# Altium PCB activity_tracker_tester.PcbDoc
Units mm, origin at the board's own origin, x right, y up, seen from the top; angles counter-clockwise.
Board outline 40 x 46 mm, 4 copper layers (Top Layer, MidLayer1, Mid-Layer 2, Bottom Layer), stack 0.79 mm thick; 37 components, 32 nets, 125 pads, 2 vias.
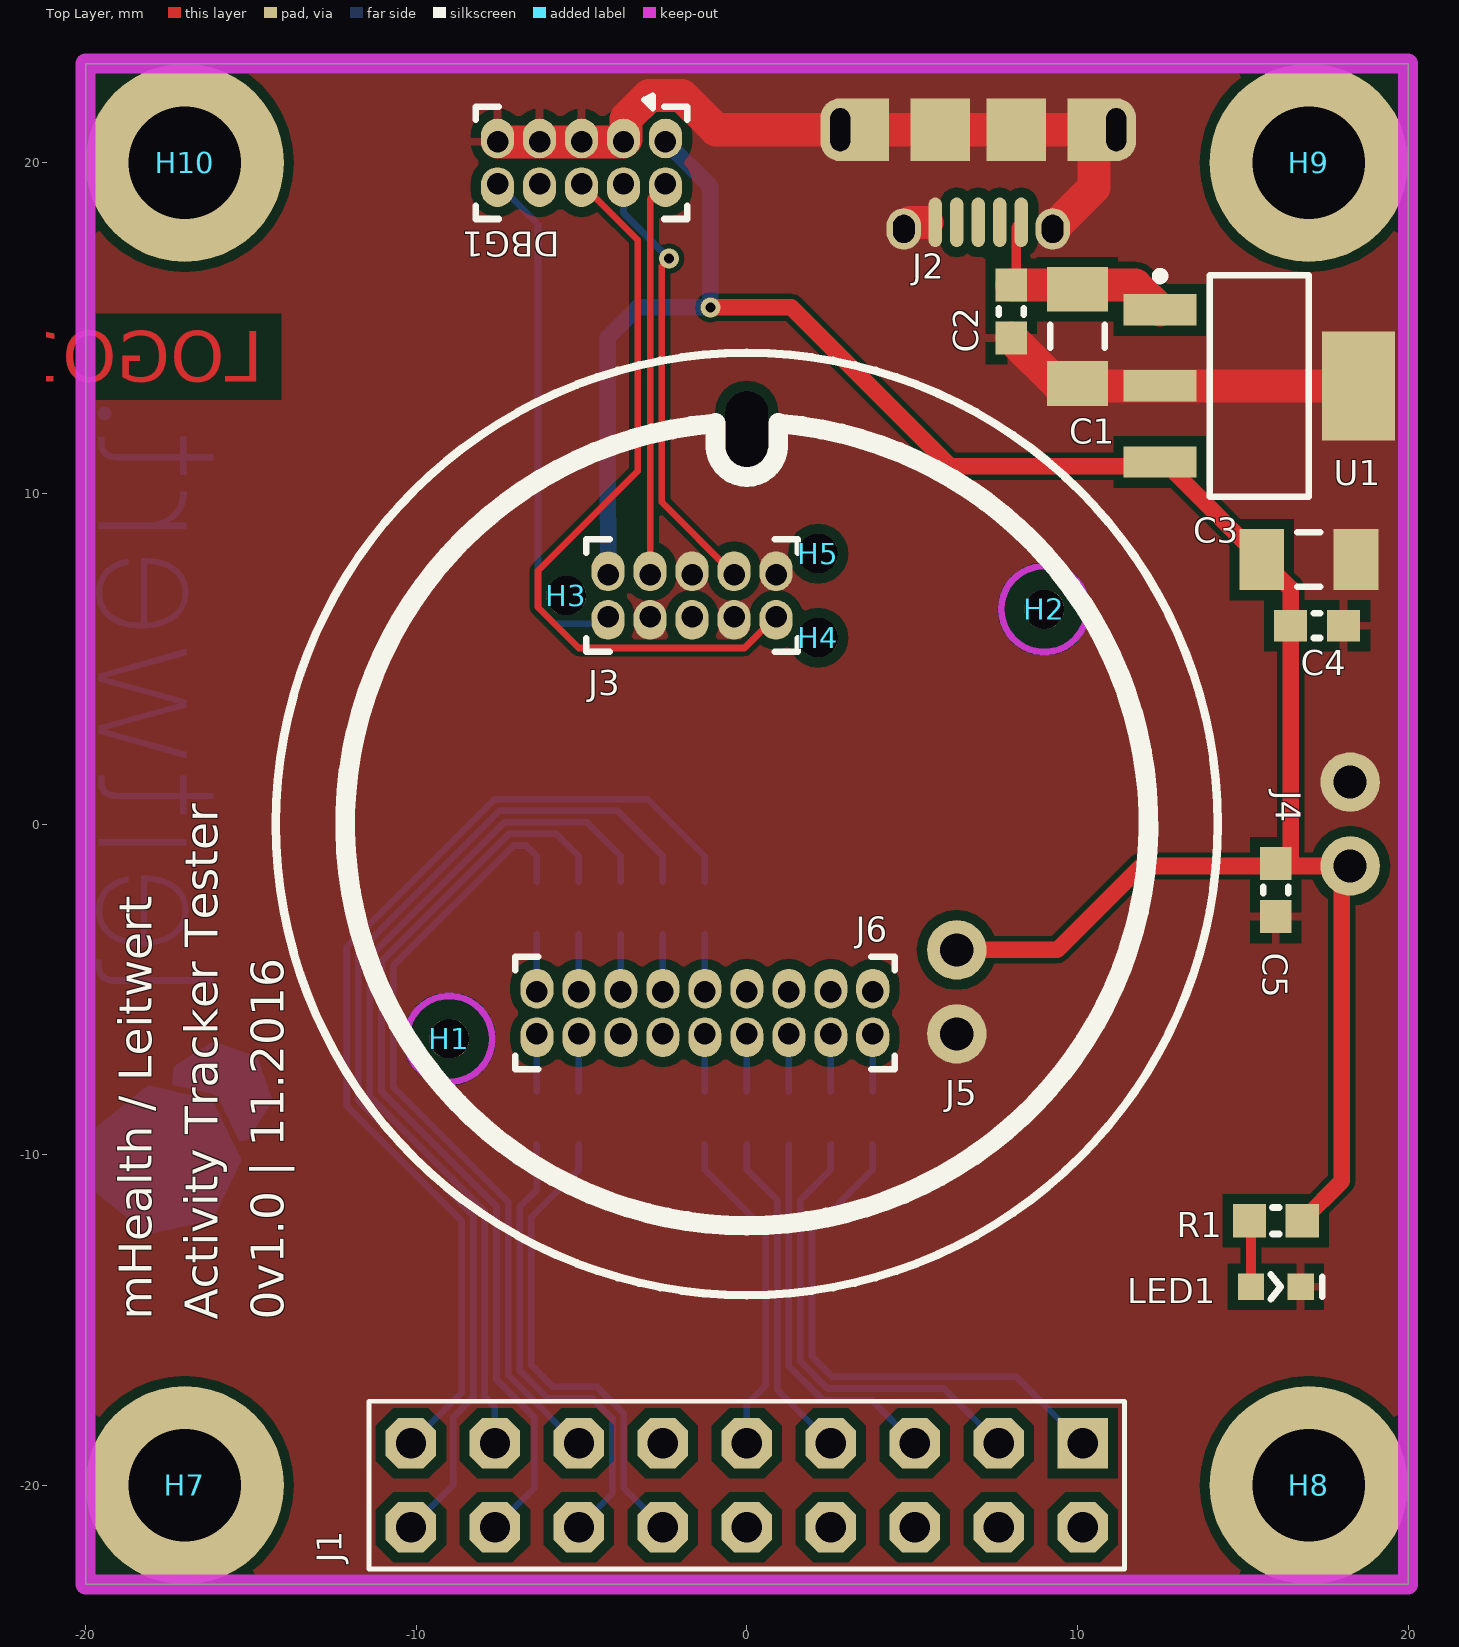
[diagram p0: Top Layer view]
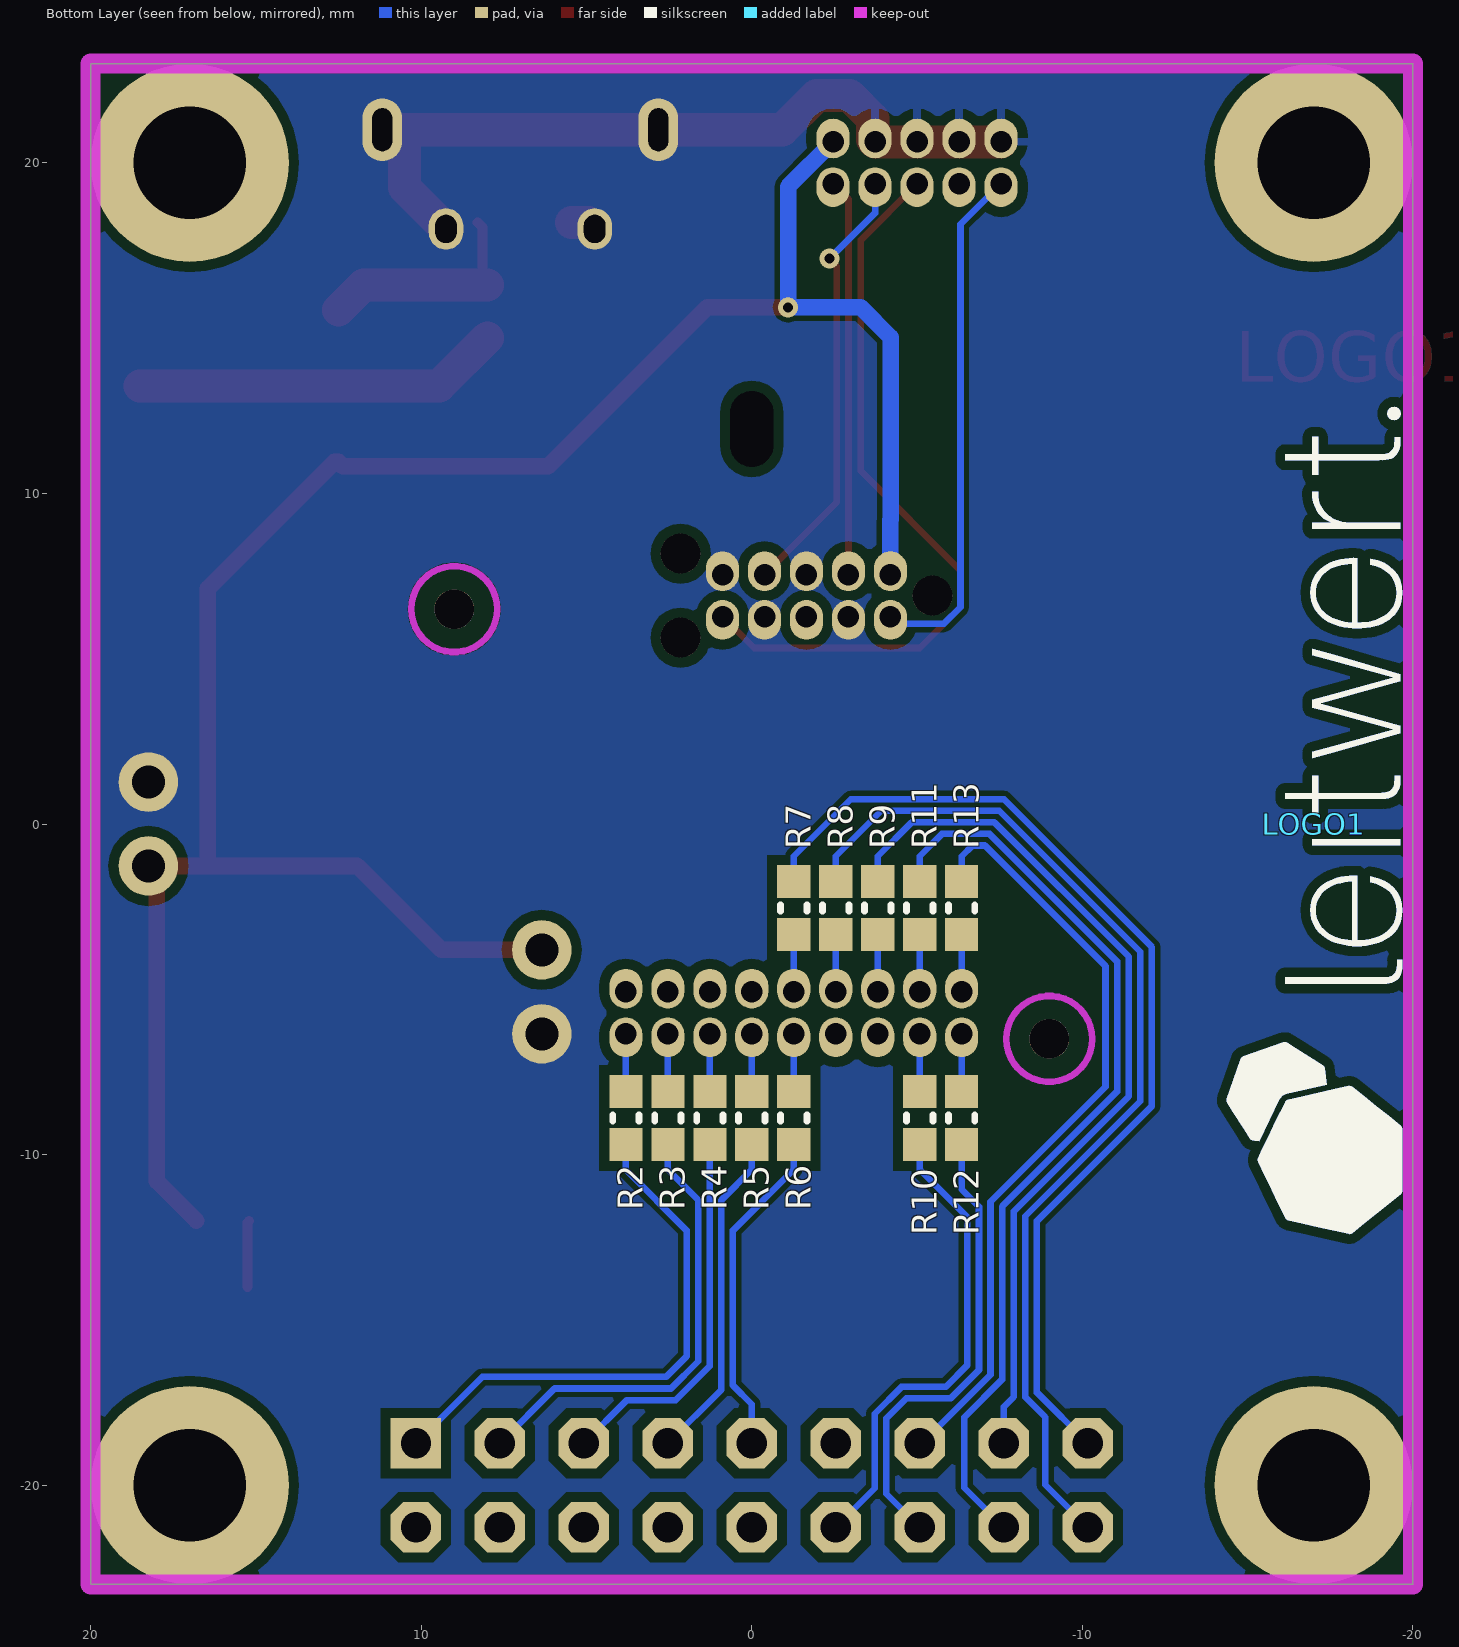
[diagram p1: Bottom Layer view, seen from below]
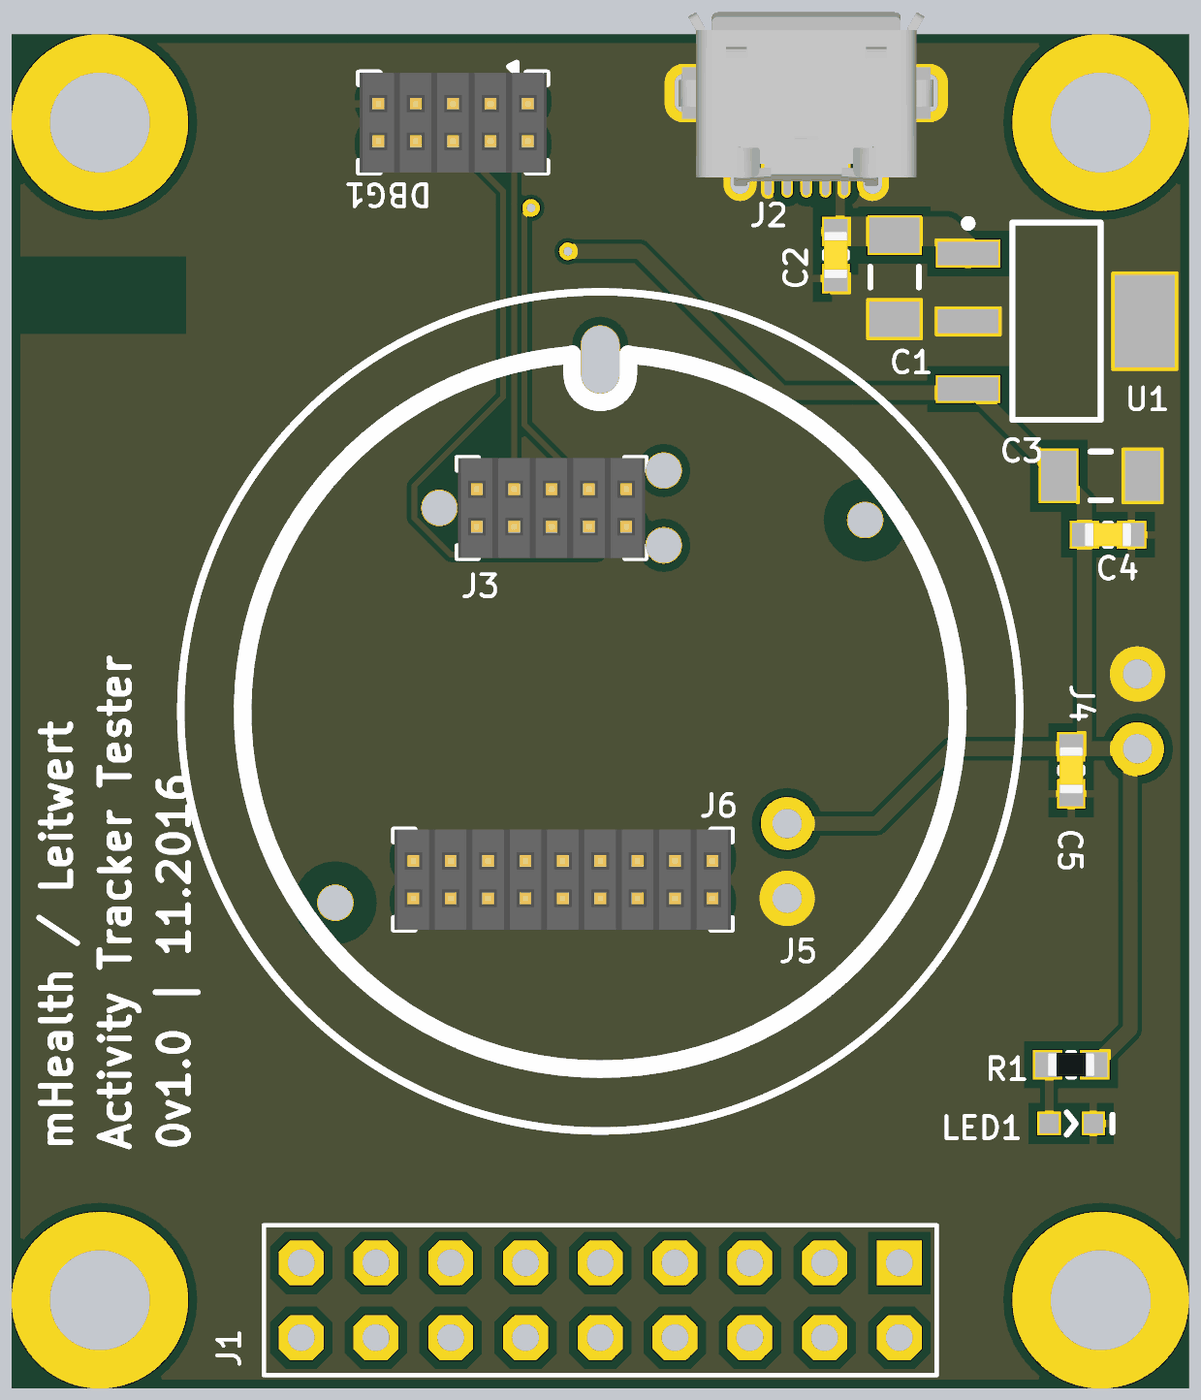
[diagram p2: 3D render of the assembled board from above, using the file's embedded part models]
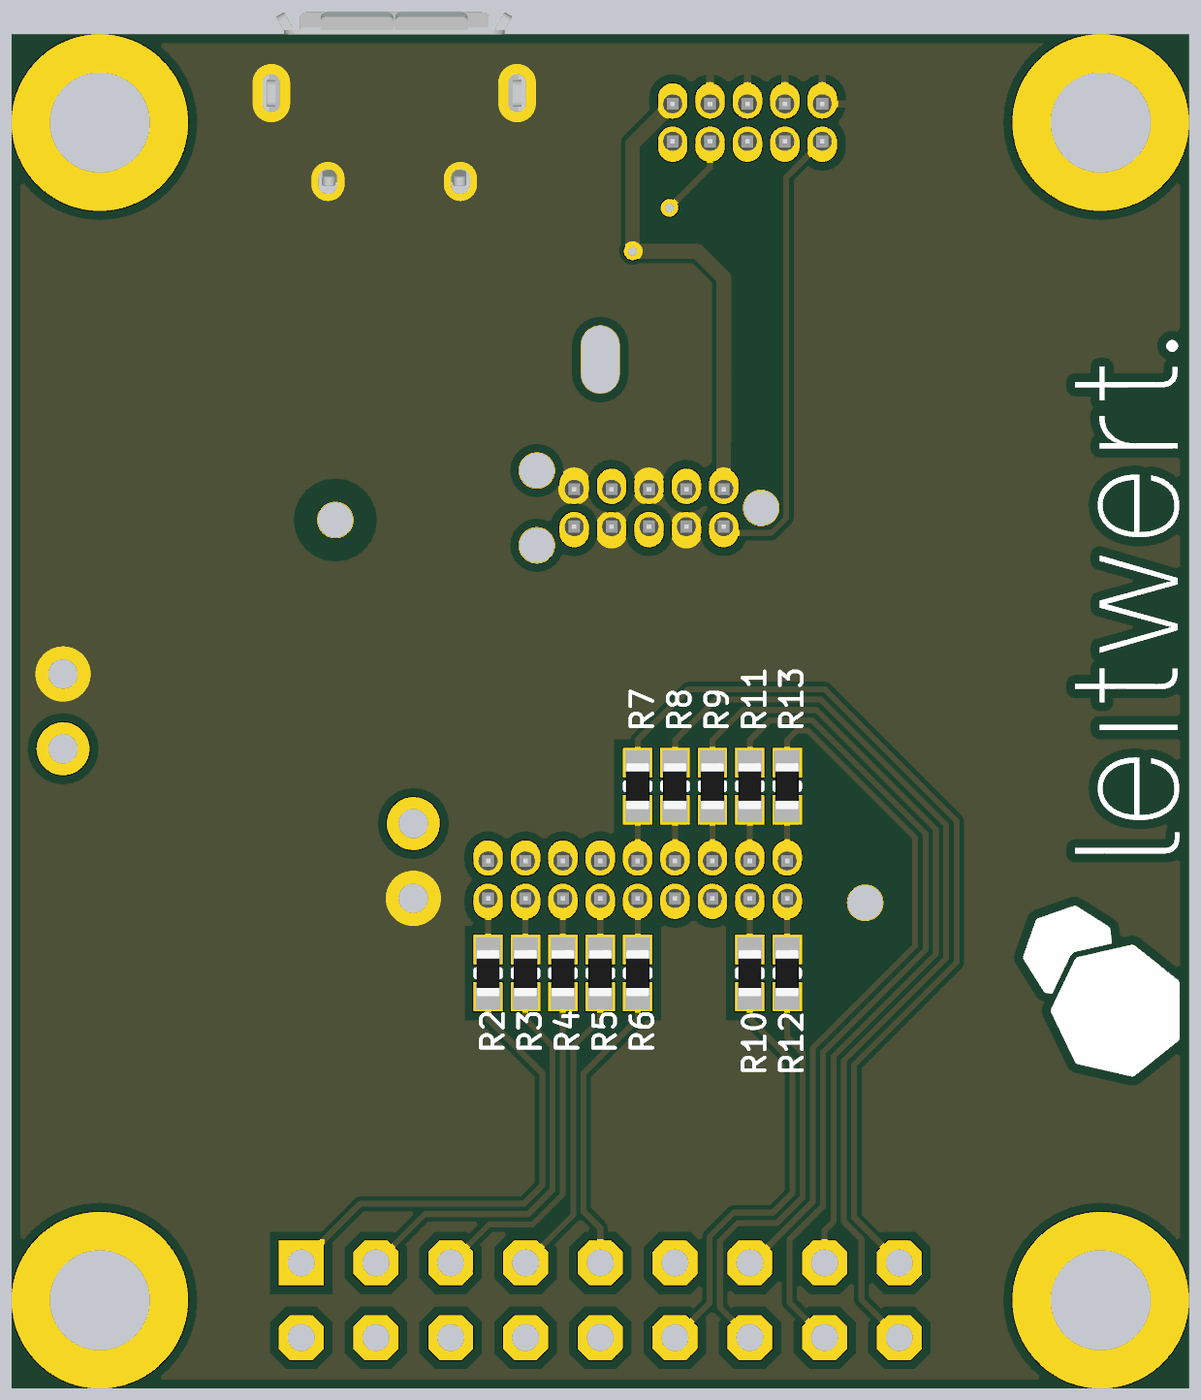
[diagram p3: 3D render of the assembled board from below, using the file's embedded part models]

## Layer stack, top to bottom
Top Layer: signal copper 0.0356
Dielectric: prepreg 0.1, FR-4, Dk 4.8
MidLayer1: signal copper 0.0356
Dielectric: prepreg 0.228, FR-4, Dk 4.8
Mid-Layer 2: signal copper 0.0356
Dielectric: core 0.32, FR-4, Dk 4.8
Bottom Layer: signal copper 0.0356

## Board outline
-20,-23 -20,23 20,23 20,-23 -20,-23

## Design rules (kind name [scope] priority, off if disabled: settings)
AcuteAngle [All] p1: minimum=4.00000000000000E+0001 checktracksonly=FALSE
Clearance ClearanceLogoStyle1 [All vs InComponentClass('logoStyle1')] p1: gap=0.3
Clearance ClearanceKeepout [All vs IsKeepOut] p2: gap=0.001
Clearance ClearanceThickWire [IsTrack And AsMM(Width) > 0.2] p3: gap=0.2
Clearance ClearancePad [IsPad vs IsPad] p4: gap=0.15
Clearance ClearancePolyPad [InPolygon vs IsPad] p5: gap=0.3
Clearance ClearancePoly [InPolygon vs InPolygon] p6: gap=0.25
Clearance [All] p7: gap=0.15
ComponentClearance [All] p1: gap=0.1 collisioncheckmode=3 verticalgap=0.1 showdistances=TRUE
ComponentOrientations [All] p1: allowedrotations=32
Height [All] p1: minheight=0 maxheight=30 prefheight=1
HoleSize [All] p1: absolutevalues=TRUE maxlimit=15 minlimit=0.3 maxpercent=80.000 minpercent=20.000
HoleToHoleClearance [All] p1: gap=0.25 allowstackedmicrovias=TRUE
MinimumAnnularRing [All] p1: minimumring=0.15
MinimumSolderMaskSliver MinimumSolderMaskSliverLogo [All vs ( InComponentClass('ignoreSilkscreen') or InComponentClass('leitwertLogo'))] p1: minsoldermaskwidth=0
MinimumSolderMaskSliver [All] p2: minsoldermaskwidth=0.1
PasteMaskExpansion [All] p1: expansion=-0.075
PermittedLayers [All] p1: toplayerpermitted=TRUE bottomlayerpermitted=FALSE
PlaneClearance [All] p1: clearance=0.5
PlaneConnect [All] p1: planeconnectstyle=Relief reliefexpansion=0.5 reliefentries=4 reliefconductorwidth=0.25 reliefairgap=0.25
PolygonConnect PolygonConnectComponents [All vs InComponentClass('directConnect')] p1: connectstyle=Direct reliefconductorwidth=0.254 reliefentries=4 polygonreliefangle="90 Angle"
PolygonConnect PolygonConnectVia [IsVia] p2: connectstyle=Direct reliefconductorwidth=0.254 reliefentries=4 polygonreliefangle="90 Angle"
PolygonConnect PolygonConnectPoly [InPolygonClass('directConnect')] p3: connectstyle=Direct reliefconductorwidth=0.254 reliefentries=4 polygonreliefangle="90 Angle"
PolygonConnect [All] p4: connectstyle=Relief reliefconductorwidth=0.25 reliefentries=4 polygonreliefangle="90 Angle"
RoomDefinition activity_tracker_tester [InComponentClass('activity_tracker_tester')] p1: confinementstyle=ConfineIn formatcopy=TRUE lockcomponents=FALSE outline -46.25,-26.5 94.499,-26.5 94.499,25 -46.25,25
RoutingCorners [All] p1: cornerstyle=45-Degree minsetback=2.5 maxsetback=2.5
RoutingVias [All] p1: holewidth=0.3 width=0.6 viastyle="Through Hole" minholewidth=0.3 minwidth=0.5 maxholewidth=1.5 maxwidth=2
SilkToSilkClearance [All] p1: silktosilkclearance=0.1
SilkscreenOverComponentPads SilkscreenOverComponentPadsLogo [All vs ( InComponentClass('ignoreSilkscreen') or InComponentClass('logoStyle1'))] p1: minsilkscreentomaskgap=0
SilkscreenOverComponentPads [All vs not InComponentClass('ignoreSilkscreen')] p2: minsilkscreentomaskgap=0.001
SolderMaskExpansion SolderMaskExpansionVia [IsVia] p1: expansion=-0.635
SolderMaskExpansion [All] p2: expansion=0.038
Width WidthLogoStyle1 [InComponentClass('logoStyle1')] p1: maxlimit=100 minlimit=0.15 preferedwidth=0.25 checkconnectedcopper=TRUE
Width [All] p2: maxlimit=10 minlimit=0.2 preferedwidth=0.2
17 further rules are at their usual default settings.

## Classes and differential pairs
component class logoStyle1: LOGO1
component class directConnect: C1 C3 H1 H2 H3 H4 H5 H7 H8 H9 H10 J1 J2 J3 J4 J5 J6 U1

## Components (designator, comment, footprint, x,y, rotation, side; value= is the part's Value field where it differs from the comment)
C1 "47u" CAPC3216X18N 10,14.75 r90 top
C2 "1u" CAPC1608X95N 8,15.5 r90 top
C3 "47u" CAPC3216X18N 17,8 r180 top
C4 "1u" CAPC1608X95N 17.25,6 r180 top
C5 "100n" CAPC1608X95N 16,-2 r90 top
DBG1 "ARM_MINI" R127_M50-3500542 -5,20 r270 top
H1 "HOLE" M1_SMALL -9,-6.5 r0 top
H2 "HOLE" M1_SMALL 9,6.5 r0 top
H3 "HOLE" M1_SMALL_NOKEEPOUT -5.465,6.91 r0 top
H4 "HOLE" M1_SMALL_NOKEEPOUT 2.155,5.64 r0 top
H5 "HOLE" M1_SMALL_NOKEEPOUT 2.155,8.18 r0 top
H7 "HOLE" M3_PLATED_MEDIUM -17,-20 r0 top
H8 "HOLE" M3_PLATED_MEDIUM 17,-20 r0 top
H9 "HOLE" M3_PLATED_MEDIUM 17,20 r0 top
H10 "HOLE" M3_PLATED_MEDIUM -17,20 r0 top
J1 "18Way2R" THT_2x9_R254 0,-20 r180 top
J2 "USB-MICRO-PLUG" 475890001 7,21 r180 top
J3 "10Way2R" R127_M50-3500542 -1.655,6.91 r270 top
J4 "2Way" 2PINR254 18.25,0 r90 top
J5 "2Way" 2PINR254 6.35,-5.08 r270 top
J6 "18Way2R" R127_M50-3500942 1.27,-5.715 r270 top
LED1 "GREEN" LED0603 16,-14 r0 top
LOGO1 "LOGO_LW" LW_MWOB_30MM_BW_VEC -17,0 r90 bottom
R1 "1k" RESC1608X55N 16,-12 r0 top
R2 "0R" RESC1608X55N 3.81,-8.89 r90 bottom
R3 "0R" RESC1608X55N 2.54,-8.89 r90 bottom
R4 "0R" RESC1608X55N 1.27,-8.89 r90 bottom
R5 "0R" RESC1608X55N 0,-8.89 r90 bottom
R6 "0R" RESC1608X55N -1.27,-8.89 r90 bottom
R7 "0R" RESC1608X55N -1.27,-2.54 r90 bottom
R8 "0R" RESC1608X55N -2.54,-2.54 r90 bottom
R9 "0R" RESC1608X55N -3.81,-2.54 r90 bottom
R10 "0R" RESC1608X55N -5.08,-8.89 r90 bottom
R11 "0R" RESC1608X55N -5.08,-2.54 r90 bottom
R12 "0R" RESC1608X55N -6.35,-8.89 r90 bottom
R13 "0R" RESC1608X55N -6.35,-2.54 r90 bottom
U1 "MCP1824S" SOT223P700X180-4N 15.5,13.25 r0 top

## Footprints (in the part's own frame and the unit in brackets; to place one, negate y for a bottom-side part, rotate by r counter-clockwise, add the part's x,y. Pads: shape width x height; smd on the part's side, far side on the other; paste and mask are expansions set on the pad)
2PINR254 [mm] "2 pin raster 2.54"
  round 1.8 hole 1: 1(-1.27,0) 2(1.27,0)
475890001 [mm] "USB - micro AB Receptacle Connector 5 Position Surface Mount, Right Angle, Horizontal"
  oval 0.4x1.5 smd: 1(-1.3,2.8) 2(-0.65,2.8) 3(0,2.8) 4(0.65,2.8) 5(1.3,2.8)
  oval 1.2x1.9 hole 0.6 slot 1.3 at 90 deg: S(-4.175,0) S(4.175,0)
  rect 1.6x1.9 smd: S(-3.5,0) S(3.5,0)
  oval 1.05x1.25 hole 0.65 slot 0.85 at 90 deg: S(-2.25,3) S(2.25,3)
  rect 1.8x1.9 smd: S(-1.15,0) S(1.15,0)
  body extent -4.32,-2.74 4.32,3.15, height 2.76
CAPC1608X95N [mm] "Chip Capacitor, 2-Leads, Body 1.6x0.8mm, IPC Medium Density, 0603"
  rect 1x0.95 smd: 1(-0.8,0) 2(0.8,0)
  silkscreen extent -0.1,-0.38 0.1,0.38, body extent -0.8,-0.4 0.8,0.4, height 0.95
CAPC3216X18N [mm] "Chip Capacitor, 2-Leads, Body 3.2x1.6mm, IPC Medium Density"
  rect 1.35x1.85 smd: 1(-1.425,0) 2(1.425,0)
  silkscreen extent -0.35,-0.82 0.35,0.82, body extent -1.7,-0.9 1.7,0.9, height 1.8
LED0603 [mm] "1.6X0.8mm SMD CHIP LED"
  rect 0.8x0.8 smd: 1(-0.75,0) 2(0.75,0)
  silkscreen extent -0.15,-0.38 1.4,0.38, body extent -0.8,-0.4 0.8,0.4, height 0.55
LW_MWOB_30MM_BW_VEC [mm] "Leitwert logo (BW) (30mm) for PCB with white solder mask and black silkscreen (vector graphic)"
  Top Layer region: -10.132,1.694 -10.105,1.686 -9.859,1.568 -9.736,1.509 -9.613,1.448 -9.613,1.448 -9.313,1.304 -9.013,1.16 -8.713,1.015 -8.413,0.871 -8.397,0.86 -8.39,0.856 -8.39,0.856 -8.369,0.833 -8.369,0.833 -8.362,0.823 -8.352,0.808 -8.343,0.782 -8.343,0.782 -8.238,0.324 -8.133,-0.133 -8.028,-0.592 -8.028,-0.592 -7.924,-1.05 -7.924,-1.05 -7.922,-1.078 -7.926,-1.107 -7.926,-1.107 -7.935,-1.137 -7.949,-1.161 -7.949,-1.161 -8.242,-1.528 -8.535,-1.895 -8.828,-2.262 -9.121,-2.629 -9.121,-2.629 -9.141,-2.649 -9.167,-2.664 -9.167,-2.664 -9.195,-2.675 -9.223,-2.678 -11.102,-2.678 -11.13,-2.675 -11.158,-2.664 -11.158,-2.664 -11.184,-2.649 -11.184,-2.649 -11.205,-2.629 -11.205,-2.629 -11.791,-1.895 -11.791,-1.895 -12.083,-1.528 -12.376,-1.161 -12.376,-1.161 -12.389,-1.137 -12.399,-1.107 -12.403,-1.078 -12.401,-1.05 -12.401,-1.05 -12.193,-0.133 -12.088,0.324 -11.983,0.782 -11.973,0.808 -11.957,0.833 -11.957,0.833 -11.935,0.856 -11.912,0.871 -11.489,1.074 -11.065,1.278 -10.642,1.483 -10.219,1.686 -10.193,1.694 -10.193,1.694 -10.162,1.698
  Top Layer region: -4.642,-2.103 -4.642,-2.103 -4.642,-2.103 -4.64,-2.172 -4.64,-2.172 -4.64,-2.172 -4.633,-2.233 -4.633,-2.233 -4.633,-2.233 -4.623,-2.286 -4.623,-2.286 -4.623,-2.286 -4.608,-2.332 -4.608,-2.332 -4.608,-2.333 -4.588,-2.372 -4.588,-2.372 -4.588,-2.372 -4.565,-2.407 -4.565,-2.407 -4.565,-2.407 -4.536,-2.437 -4.536,-2.437 -4.536,-2.437 -4.503,-2.461 -4.503,-2.461 -4.503,-2.461 -4.466,-2.481 -4.466,-2.481 -4.466,-2.481 -4.426,-2.498 -4.426,-2.498 -4.381,-2.508 -4.381,-2.508 -4.381,-2.508 -4.333,-2.516 -4.333,-2.516 -4.333,-2.516 -4.281,-2.52 -4.281,-2.52 -4.281,-2.52 -4.225,-2.521 -4.225,-2.521 -4.225,-2.521 -4.165,-2.521 -4.101,-2.52 -4.101,-2.675 -4.172,-2.677 -4.172,-2.677 -4.241,-2.678 -4.309,-2.676 -4.377,-2.673 -4.377,-2.673 -4.441,-2.664 -4.441,-2.664 -4.502,-2.649 -4.502,-2.649 -4.56,-2.629 -4.613,-2.602 -4.613,-2.602 -4.661,-2.569 -4.661,-2.569 -4.704,-2.528 -4.704,-2.528 -4.742,-2.481 -4.776,-2.425 -4.776,-2.425 -4.802,-2.362 -4.802,-2.362 -4.819,-2.286 -4.819,-2.286 -4.827,-2.2 -4.827,0.865 -4.642,0.865
  Top Layer region: -8.313,2.63 -8.313,2.63 -8.012,2.524 -7.711,2.42 -7.409,2.315 -7.108,2.209 -7.108,2.209 -7.084,2.195 -7.06,2.177 -7.06,2.177 -7.04,2.152 -7.027,2.128 -7.027,2.128 -6.922,1.828 -6.817,1.526 -6.711,1.224 -6.606,0.923 -6.6,0.895 -6.601,0.866 -6.601,0.866 -6.607,0.835 -6.619,0.81 -6.788,0.539 -7.298,-0.271 -7.298,-0.271 -7.316,-0.293 -7.316,-0.293 -7.341,-0.312 -7.368,-0.325 -7.394,-0.332 -7.394,-0.332 -7.516,-0.347 -7.516,-0.347 -7.639,-0.359 -7.883,-0.387 -8.159,0.823 -8.159,0.823 -8.159,0.823 -8.183,0.89 -8.183,0.89 -8.183,0.89 -8.222,0.951 -8.222,0.951 -8.222,0.951 -8.273,1.003 -8.273,1.003 -8.273,1.003 -8.332,1.04 -8.332,1.04 -8.332,1.04 -8.962,1.344 -9.276,1.495 -9.591,1.647 -9.579,1.744 -9.575,1.793 -9.569,1.841 -9.569,1.841 -9.562,1.868 -9.562,1.868 -9.548,1.897 -9.529,1.92 -9.529,1.92 -9.508,1.938 -9.238,2.108 -8.697,2.448 -8.427,2.618 -8.427,2.618 -8.401,2.628 -8.372,2.636 -8.372,2.636 -8.341,2.637
  Top Layer region: -0.461,-2.612 -0.639,-2.612 -0.639,0.04 -0.461,0.04
  Top Layer region: 193 vertices and 1 holes, not listed, extent -3.696,-2.673 -1.562,0.102
  Top Layer region: 0.936,0.041 0.936,0.041 0.936,0.041 1.46,0.041 1.46,-0.131 0.936,-0.131 0.936,-0.131 0.936,-0.131 0.936,-1.982 0.936,-1.982 0.936,-1.982 0.938,-2.058 0.938,-2.058 0.938,-2.058 0.944,-2.125 0.944,-2.125 0.944,-2.125 0.954,-2.184 0.954,-2.184 0.954,-2.184 0.968,-2.234 0.968,-2.234 0.968,-2.234 0.987,-2.277 0.987,-2.277 0.987,-2.277 1.011,-2.316 1.011,-2.316 1.011,-2.316 1.037,-2.349 1.037,-2.349 1.037,-2.349 1.069,-2.376 1.069,-2.376 1.069,-2.376 1.105,-2.398 1.105,-2.398 1.105,-2.398 1.144,-2.416 1.144,-2.416 1.144,-2.416 1.187,-2.429 1.187,-2.429 1.187,-2.429 1.233,-2.435 1.233,-2.435 1.233,-2.435 1.283,-2.44 1.283,-2.44 1.283,-2.44 1.337,-2.442 1.456,-2.442 1.456,-2.611 1.389,-2.614 1.389,-2.614 1.322,-2.615 1.256,-2.613 1.256,-2.613 1.191,-2.607 1.191,-2.607 1.129,-2.598 1.129,-2.598 1.07,-2.581 1.07,-2.581 1.015,-2.559 1.015,-2.559 0.964,-2.529 0.964,-2.529 0.917,-2.494 0.917,-2.494 0.875,-2.45 0.875,-2.45 0.838,-2.398 0.806,-2.337 0.806,-2.337 0.782,-2.267 0.765,-2.183 0.765,-2.183 0.758,-2.088 0.758,-0.13 0.757,-0.13 0.757,-0.13 0.312,-0.13 0.312,0.041 0.758,0.041 0.758,0.041 0.758,0.041 0.758,0.866 0.936,0.866
  Top Layer region: 12.495,-2.238 12.56,-2.282 12.605,-2.347 12.621,-2.429 12.605,-2.509 12.56,-2.574 12.495,-2.619 12.414,-2.634 12.334,-2.619 12.268,-2.574 12.224,-2.509 12.208,-2.429 12.224,-2.347 12.268,-2.282 12.334,-2.238 12.414,-2.222
  Top Layer region: 194 vertices and 1 holes, not listed, extent 5.914,-2.673 8.047,0.102
  Top Layer region: 5.112,-0.623 4.918,-1.286 4.726,-1.948 4.532,-2.611 4.311,-2.611 3.981,-1.409 3.981,-1.409 3.815,-0.809 3.65,-0.208 3.65,-0.208 3.65,-0.208 3.65,-0.208 3.65,-0.208 3.65,-0.208 3.65,-0.208 3.641,-0.208 3.641,-0.208 3.641,-0.208 3.641,-0.208 3.641,-0.208 3.641,-0.208 3.641,-0.208 3.474,-0.809 3.474,-0.809 3.474,-0.809 3.142,-2.009 2.975,-2.611 2.75,-2.611 2.177,-0.623 1.986,0.04 2.178,0.04 2.348,-0.567 2.348,-0.567 2.348,-0.567 2.518,-1.173 2.689,-1.778 2.689,-1.778 2.689,-1.778 2.858,-2.383 2.858,-2.383 2.858,-2.383 2.858,-2.383 2.858,-2.383 2.858,-2.383 2.858,-2.383 2.867,-2.383 2.867,-2.383 2.867,-2.383 2.867,-2.383 2.867,-2.383 2.867,-2.383 2.867,-2.383 3.196,-1.173 3.196,-1.173 3.196,-1.173 3.359,-0.567 3.524,0.04 3.763,0.04 3.928,-0.567 4.093,-1.173 4.093,-1.173 4.093,-1.173 4.424,-2.383 4.424,-2.383 4.424,-2.383 4.424,-2.383 4.424,-2.383 4.424,-2.383 4.424,-2.383 4.433,-2.383 4.433,-2.383 4.433,-2.383 4.433,-2.383 4.433,-2.383 4.433,-2.383 4.433,-2.383 4.602,-1.778 4.771,-1.173 4.771,-1.173 4.94,-0.567 4.94,-0.567 5.108,0.04 5.305,0.04
  Top Layer region: 10.043,-0.141 9.97,-0.134 9.97,-0.134 9.97,-0.134 9.892,-0.138 9.892,-0.138 9.892,-0.138 9.81,-0.15 9.81,-0.15 9.81,-0.15 9.722,-0.172 9.722,-0.172 9.722,-0.172 9.633,-0.204 9.633,-0.204 9.633,-0.204 9.546,-0.254 9.546,-0.254 9.546,-0.254 9.461,-0.319 9.461,-0.319 9.378,-0.399 9.378,-0.399 9.378,-0.399 9.346,-0.436 9.346,-0.436 9.346,-0.436 9.316,-0.475 9.316,-0.475 9.289,-0.512 9.289,-0.512 9.262,-0.549 9.262,-0.549 9.262,-0.549 9.24,-0.584 9.24,-0.584 9.218,-0.624 9.218,-0.624 9.218,-0.624 9.198,-0.666 9.198,-0.666 9.181,-0.707 9.181,-0.707 9.166,-0.753 9.166,-0.753 9.166,-0.753 9.152,-0.801 9.152,-0.801 9.152,-0.801 9.14,-0.851 9.14,-0.851 9.13,-0.904 9.13,-0.904 9.13,-0.904 9.121,-0.961 9.121,-0.961 9.121,-0.961 9.114,-1.023 9.11,-1.089 9.11,-1.089 9.11,-1.089 9.106,-1.162 9.106,-1.162 9.106,-1.162 9.106,-2.611 8.928,-2.611 8.928,0.041 9.106,0.041 9.106,-0.549 9.105,-0.549 9.105,-0.549 9.105,-0.549 9.105,-0.549 9.105,-0.549 9.119,-0.549 9.119,-0.549 9.119,-0.549 9.119,-0.549 9.119,-0.549 9.119,-0.549 9.119,-0.549 9.14,-0.485 9.14,-0.485 9.166,-0.423 9.199,-0.364 9.199,-0.364 9.24,-0.306 9.24,-0.306 9.285,-0.252 9.285,-0.252 9.335,-0.2 9.39,-0.152 9.39,-0.152 9.45,-0.109 9.45,-0.109 9.514,-0.072 9.514,-0.072 9.581,-0.037 9.652,-0.008 9.652,-0.008 9.726,0.016 9.726,0.016 9.804,0.035 9.804,0.035 9.882,0.049 9.882,0.049 9.962,0.054 10.043,0.054
  Top Layer region: 11.182,0.041 11.182,0.041 11.182,0.041 11.707,0.041 11.707,-0.131 11.182,-0.131 11.182,-0.131 11.182,-0.131 11.182,-1.982 11.184,-2.058 11.184,-2.058 11.184,-2.058 11.19,-2.125 11.19,-2.125 11.19,-2.125 11.2,-2.184 11.2,-2.184 11.2,-2.184 11.215,-2.234 11.215,-2.234 11.215,-2.234 11.233,-2.277 11.233,-2.277 11.233,-2.277 11.256,-2.316 11.256,-2.316 11.256,-2.316 11.284,-2.349 11.284,-2.349 11.284,-2.349 11.316,-2.376 11.316,-2.376 11.316,-2.376 11.351,-2.398 11.351,-2.398 11.351,-2.398 11.391,-2.416 11.391,-2.416 11.391,-2.416 11.433,-2.429 11.433,-2.429 11.433,-2.429 11.479,-2.435 11.53,-2.44 11.53,-2.44 11.53,-2.44 11.584,-2.442 11.702,-2.442 11.702,-2.611 11.635,-2.614 11.635,-2.614 11.568,-2.615 11.502,-2.613 11.502,-2.613 11.437,-2.607 11.437,-2.607 11.374,-2.598 11.374,-2.598 11.316,-2.581 11.316,-2.581 11.261,-2.559 11.261,-2.559 11.21,-2.529 11.21,-2.529 11.164,-2.494 11.164,-2.494 11.121,-2.45 11.121,-2.45 11.085,-2.398 11.053,-2.337 11.053,-2.337 11.028,-2.267 11.012,-2.183 11.012,-2.183 11.003,-2.088 11.004,-1.981 11.004,-1.981 11.004,-1.981 11.004,-0.13 11.004,-0.13 11.004,-0.13 10.558,-0.13 10.558,0.041 11.004,0.041 11.004,0.041 11.004,0.041 11.004,0.866 11.182,0.866
  silkscreen extent -12.4,-2.68 12.62,2.64
M1_SMALL [mm] "Plated M1Hole Small Size, Dia 1.2mm"
  round 1.2 hole 1.2 paste-3: H(0,0)
  Top Layer keep-out circle w0.2: c0,0 r1.3
  Bottom Layer keep-out circle w0.2: c0,0 r1.3
M1_SMALL_NOKEEPOUT [mm] "Plated M1Hole Small Size, Dia 1.2mm"
  round 1.2 hole 1.2 paste-3: H(0,0)
M3_PLATED_MEDIUM [mm] "Plated M3 Hole Medium Size"
  round 6 hole 3.4 paste-3: H(0,0)
R127_M50-3500542 [mm] "Harwin M50-3500542, 1.27mm pitch, 10pin, 2 row"
  oval 1.2x1 hole 0.65 copper offset -0.1,0: 1(-0.635,2.54) 3(-0.635,1.27) 5(-0.635,0) 7(-0.635,-1.27) 9(-0.635,-2.54)
  oval 1.2x1 hole 0.65 copper offset 0.1,0: 2(0.635,2.54) 4(0.635,1.27) 6(0.635,0) 8(0.635,-1.27) 10(0.635,-2.54)
  silkscreen extent -2.03,-3.2 1.7,3.2, body extent -1.7,-3.17 1.7,3.18, height 4
R127_M50-3500942 [mm] "Harwin M50-3500942, 1.27mm pitch, 18pin, 2 row"
  oval 1.2x1 hole 0.65 copper offset -0.1,0: 1(-0.635,2.54) 3(-0.635,1.27) 5(-0.635,0) 7(-0.635,-1.27) 9(-0.635,-2.54) 11(-0.635,-3.81) 13(-0.635,-5.08) 15(-0.635,-6.35) 17(-0.635,-7.62)
  oval 1.2x1 hole 0.65 copper offset 0.1,0: 2(0.635,2.54) 4(0.635,1.27) 6(0.635,0) 8(0.635,-1.27) 10(0.635,-2.54) 12(0.635,-3.81) 14(0.635,-5.08) 16(0.635,-6.35) 18(0.635,-7.62)
  silkscreen extent -1.7,-8.28 1.7,3.2, body extent -1.7,-8.25 1.7,3.18, height 4
RESC1608X55N [mm] "Chip Resistor, 2-Leads, Body 1.6x0.8mm, IPC Medium Density, 0603"
  rect 1x1 smd: 1(-0.8,0) 2(0.8,0)
  silkscreen extent -0.1,-0.4 0.1,0.4, body extent -0.8,-0.4 0.8,0.4, height 0.55
SOT223P700X180-4N [mm] "SOT223, 4-Leads, Body 6.7x7.3mm (max), Pitch 2.30mm, IPC Medium Density"
  rect 2.2x0.95 smd: 1(-3,2.3) 2(-3,0) 3(-3,-2.3)
  rect 2.2x3.3 smd: 2(3,0)
  silkscreen extent -3.12,-3.35 1.5,3.45, body extent -1.85,-3.35 1.85,3.35, height 1.8
THT_2x9_R254 [mil] "Pin Header 2x9"
  rect 60x60 hole 36: 1(-400,-50)
  oct 60x60 hole 36: 2(-400,50) 3(-300,-50) 4(-300,50) 5(-200,-50) 6(-200,50) 7(-100,-50) 8(-100,50) 9(0,-50) 10(0,50) 11(100,-50) 12(100,50) 13(200,-50) 14(200,50) 15(300,-50) 16(300,50) 17(400,-50) 18(400,50)
  silkscreen extent -450,-100 450,100

## Part data
C1 C2 C3 C4 C5: library part C, "Capacitor"
DBG1: "ARM Mini JTAG / SWD 10-pin connector"
H1 H2 H3 H4 H5 H7 H8 H9 H10: "Hole"
J1 J6: "18 Way 2 Row Connector"
J2: "USB Micro Plug"
J3: "10 Way 2 Row Connector"
J4 J5: "2 Way Connector"
LED1: library part LED, "LED"
LOGO1: "Leitwert Logo"
R1 R2 R3 R4 R5 R6 R7 R8 R9 R10 R11 R12 R13: library part R, "Resistor"
U1: "300 mA, Low Voltage, Low Quiescent Current LDO Regulator"

## Free pads (board coordinates)
  round 0 hole 1.3 slot 2.3 at 90 deg: 0(0,11.95)

## Via types
v1: diameter 0.6, hole 0.3, Top Layer to Bottom Layer, 2 vias

## Nets (pads, with @x,y where several pads share a name; then routed paths per layer and width w, separated by ;. In a path a pad name is that pad's centre, name@x,y a point inside that pad or via, vN(x,y) a via of type N, cw(c..) or ccw(c..) an arc to the next point about the centre after c; other vN are vias at no path point)
+3V3: C3.2 C4.2 C5.2 DBG1.1 J3.9 J4.1 J5.1 R1.2 U1.3 | length 71.9
  Top Layer w0.5: v1(-1.1,15.625) 1.35,15.625 6.15,10.825 12.375,10.825 U1.3 12.625,10.95 C3.2 16.45,7.125 C4.2 16.45,-1.27 J4.1 ; J5.1 8.61,-3.81 9.39,-3.81 11.93,-1.27 J4.1 ; R1.2 18,-10.8 18,-1.52 J4.1
  Bottom Layer w0.5: J3.9 -4.195,9.195 -4.2,9.2 -4.2,14.725 -3.3,15.625 v1(-1.1,15.625) -1.1,19.278 -2.457,20.635 DBG1.1
+5V: C1.2 C2.2 J2.1 U1.1 | length 6.8
  Top Layer w0.3: C2.2 8.15,16.45 8.15,18.05 J2.1
  Top Layer w1: C2.2 11.75,16.3 U1.1
ACC_ADC: J1.14 R12.1 | length 14.2
  Bottom Layer w0.2: R12.1 -6.35,-11.054 -6.871,-11.575 -6.871,-16.514 -6.01,-17.375 -4.675,-17.375 -4.068,-17.982 -4.068,-20.258 J1.14
ACC_C\S\: J1.15 R9.2 | length 26.7
  Bottom Layer w0.2: J1.15 -7.62,-17.63 -7.921,-17.329 -7.921,-11.719 -11.4,-8.24 -11.4,-4.01 -7.34,0.05 -4.835,0.05 -3.81,-0.975 R9.2
ACC_INT1: J1.18 R8.2 | length 31.9
  Bottom Layer w0.2: J1.18 -8.875,-19.985 -8.875,-17.94 -8.271,-17.336 -8.271,-11.863 -11.75,-8.385 -11.75,-3.865 -7.485,0.4 -3.915,0.4 -2.54,-0.975 R8.2
ACC_INT2: J1.17 R7.2 | length 31.2
  Bottom Layer w0.2: J1.17 -8.625,-17.195 -8.625,-12.01 -12.104,-8.531 -12.104,-3.724 -7.63,0.75 -2.995,0.75 -1.27,-0.975 R7.2
ACC_MISO: J1.16 R11.2 | length 28.1
  Bottom Layer w0.2: J1.16 -6.425,-20.075 -6.425,-17.95 -7.571,-16.804 -7.571,-11.574 -11.05,-8.095 -11.05,-4.155 -7.195,-0.3 -5.755,-0.3 -5.08,-0.975 R11.2
ACC_MOSI: J1.12 R10.1 | length 14.6
  Bottom Layer w0.2: R10.1 -5.08,-10.455 -6.521,-11.896 -6.521,-16.369 -5.865,-17.025 -4.53,-17.025 -3.718,-17.837 -3.718,-20.092 J1.12
ACC_SCK: J1.13 R13.2 | length 23.6
  Bottom Layer w0.2: R13.2 -6.35,-0.975 -6.675,-0.65 -7.05,-0.65 -10.7,-4.3 -10.7,-7.95 -7.221,-11.429 -7.221,-16.659 -5.15,-18.73 J1.13
FL_C\S\: J1.9 R6.1 | length 10
  Bottom Layer w0.2: R6.1 -1.27,-10.455 0.57,-12.295 0.57,-16.98 0,-17.55 J1.9
FL_F\S\H\D\N\: J1.1 R2.1 | length 16.5
  Bottom Layer w0.2: R2.1 3.81,-10.455 1.97,-12.295 1.97,-16.105 2.59,-16.725 8.155,-16.725 J1.1
FL_MISO: J1.7 R5.1 | length 10.1
  Bottom Layer w0.2: R5.1 0,-10.455 0.92,-11.375 0.92,-17.11 J1.7
FL_MOSI: J1.5 R4.1 | length 11.5
  Bottom Layer w0.2: R4.1 1.27,-16.395 2.3,-17.425 3.775,-17.425 J1.5
FL_SCK: J1.3 R3.1 | length 14
  Bottom Layer w0.2: R3.1 2.54,-10.455 1.62,-11.375 1.62,-16.25 2.445,-17.075 5.965,-17.075 J1.3
GND: C1.1 C2.1 C3.1 C4.1 C5.1 DBG1.3 DBG1.5 DBG1.7 DBG1.9 J2.5 J2.S J3.1 J3.4 J3.5 J3.8 J4.2 J5.2 LED1.2 U1.2 | length 34.8
  Top Layer w1: DBG1.9 DBG1.7 DBG1.5 DBG1.3 -3.66,20.705 -3.66,21.332 -2.957,22.035 -1.963,22.035 -0.928,21 2.825,21 3.5,21 5.85,21 8.15,21 10.5,21 10.5,19.25 J2.S@9.25,18 ; J2.S@4.75,18 4.95,18.2 5.45,18.2 ; C2.1 9.45,13.25 12.5,13.25 U1.2@18.5,13.25
NetJ6_2: J6.2 R2.2 | length 1.7
  Bottom Layer w0.2: R2.2 J6.2
NetJ6_4: J6.4 R3.2 | length 1.7
  Bottom Layer w0.2: R3.2 J6.4
NetJ6_6: J6.6 R4.2 | length 1.7
  Bottom Layer w0.2: R4.2 J6.6
NetJ6_8: J6.8 R5.2 | length 1.7
  Bottom Layer w0.2: R5.2 J6.8
NetJ6_9: J6.9 R7.1 | length 1.7
  Bottom Layer w0.2: J6.9 R7.1
NetJ6_10: J6.10 R6.2 | length 1.7
  Bottom Layer w0.2: R6.2 J6.10
NetJ6_11: J6.11 R8.1 | length 1.7
  Bottom Layer w0.2: J6.11 R8.1
NetJ6_13: J6.13 R9.1 | length 1.7
  Bottom Layer w0.2: J6.13 R9.1
NetJ6_15: J6.15 R11.1 | length 1.7
  Bottom Layer w0.2: J6.15 R11.1
NetJ6_16: J6.16 R10.2 | length 1.7
  Bottom Layer w0.2: R10.2 J6.16
NetJ6_17: J6.17 R13.1 | length 1.7
  Bottom Layer w0.2: J6.17 R13.1
NetJ6_18: J6.18 R12.2 | length 1.7
  Bottom Layer w0.2: R12.2 J6.18
NetLED1_1: LED1.1 R1.1 | length 2
  Top Layer w0.3: R1.1 15.25,-12.05 LED1.1
RESET: DBG1.10 J3.10 | length 15.7
  Bottom Layer w0.2: DBG1.10 -6.315,18.14 -6.315,6.558 -5.817,6.06 -4.41,6.06 J3.10
SWDCLK: DBG1.4 J3.3 | length 13.4
  Top Layer w0.2: v1(-2.35,17.101) -2.575,16.876 -2.575,9.735 J3.3
  Bottom Layer w0.2: DBG1.4 -3.73,18.481 v1(-2.35,17.101)
SWDIO: DBG1.2 J3.7 | length 12
  Top Layer w0.2: J3.7 -2.925,18.9 DBG1.2
SWO: DBG1.6 J3.2 | length 22.9
  Top Layer w0.2: DBG1.6 -3.3,17.665 -3.3,10.675 -6.315,7.66 -6.315,6.558 -5.082,5.325 -0.074,5.325 0.876,6.275 J3.2
pads on no net: DBG1.8 H1.H H2.H H3.H H4.H H5.H H7.H H8.H H9.H H10.H J1.2 J1.4 J1.6 J1.8 J1.10 J1.11 J2.2 J2.3 J2.4 J3.6 J6.1 J6.3 J6.5 J6.7 J6.12 J6.14

## Polygon pours and split planes (outlines as drawn)
GND on Top Layer "GND" (solid, remove dead copper, pour order 2): -20,-23 -20,23 20,23 20,-23 -20,-23
GND on Bottom Layer "GND" (solid, remove dead copper, pour order 2): -20,-23 -20,23 20,23 20,-23 -20,-23

## Keep-outs
Keep-Out Layer:
  the board outline again, w0.599

## Silkscreen, mask and mechanical layers (free items; w line width, h text height)
Top Overlay:
  circle w0.254: c0,0 r14.25
  lines w0.6: -1.059,12.104 ccw(c0,0) 1.059,12.104 ; -0.952,12.133 -0.952,11.425 ccw(c0,11.45) 0.952,11.425 0.952,12.133
  text "mHealth / Leitwert" at -18,-15 h1 r90
  text "Activity Tracker Tester" at -16,-15 h1 r90
  text "0v1.0 | 11.2016" at -14,-15 h1 r90
Mechanical 15:
  circle w0.2: c0,0 r10
Outline:
  the board outline again, w0.2